# EAGLE board CAN_Base_V1 (EAGLE 9.7.0)
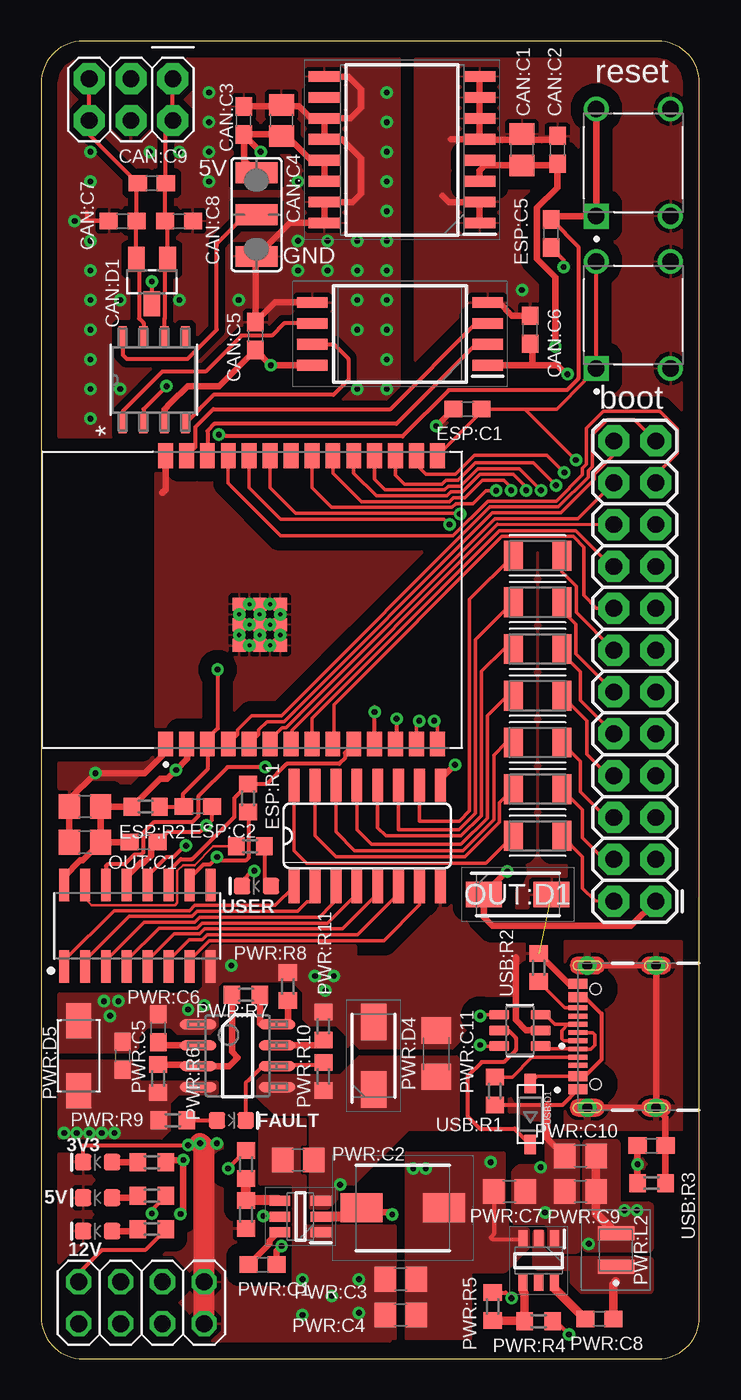
[diagram p0: board, top side]
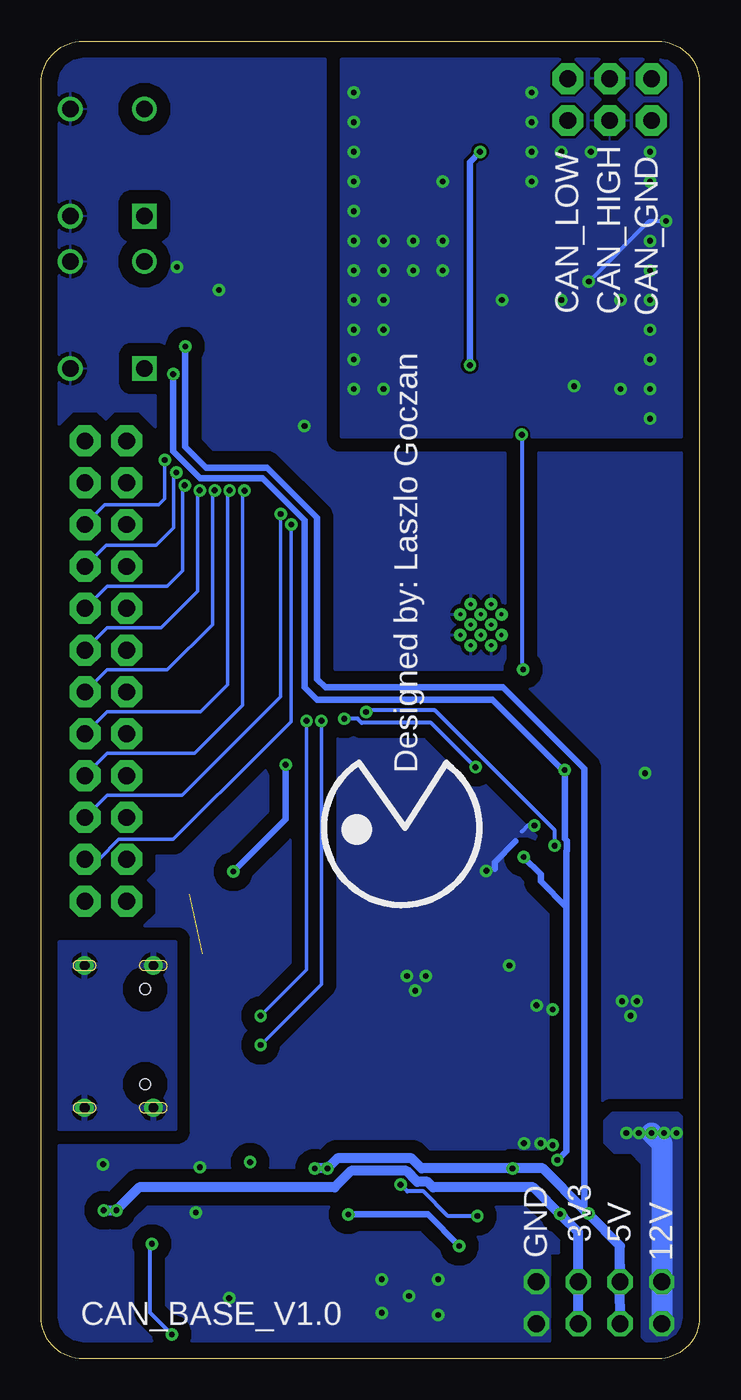
[diagram p1: board, bottom side, seen from below]

Size 40 x 80 mm. Coordinates in mm from the lower left corner, seen from the top.
Outline: 0,77.46 0,2.54 arc90 2.54,0 37.46,0 arc90 40,2.54 40,77.46 arc90 37.46,80 2.54,80 arc90 0,77.46
Copper layers (1*16): Top / Bottom
Stack-up Default Layer Stack: Top SilkScreen Epoxy Ink / Top SolderMask SR:Green 0.0254mm Dk 4.3 / Top Surface Finish Lead-Free 0.02mm / Top CuFoil:007 0.035mm / Dielectric-1 User Defined 1.5mm / Bottom CuFoil:007 0.035mm / Bottom Surface Finish Lead-Free 0.02mm / Bottom SolderMask SR:Green 0.0254mm Dk 4.3 / Bottom SilkScreen Epoxy Ink
Design rules: minimum copper width 6mil, minimum drill size 10mil, copper clearance wire_polygon to wire_polygon 6mil, copper clearance wire_polygon to pad_smd 6mil, copper clearance wire_polygon to via 6mil, copper clearance pad_smd to pad_smd 6mil, copper clearance pad_smd to via 6mil, copper clearance via to via 6mil, copper clearance smd to pad (same net) 6mil, copper clearance smd to via (same net) 6mil, copper clearance smd to smd (same net) 6mil, dimension clearance 40mil, via restrict clearance 0mil, restrict clearance 0mil, drill distance 6mil, keepout clearance 0mil

## Footprints (pad centres in the part's own frame; a part is rotated, then mirrored left to right if it is on the bottom)
C0805 = smd 1.3 x 1.5: 1 -0.95,0; 2 0.95,0
C0603 = smd 1.1 x 1: 1 -0.85,0; 2 0.85,0
SOT23 = smd 1.016 x 1.524: 1 -0.95,-1.354; 2 0.95,-1.354; 3 0,1.354
SOIC127P1030X265-16N = smd 1.925 x 0.65: 1 -4.712,4.445; 2 -4.712,3.175; 3 -4.712,1.905; 4 -4.712,0.635; 5 -4.712,-0.635; 6 -4.712,-1.905; 7 -4.712,-3.175; 8 -4.712,-4.445; 9 4.712,-4.445; 10 4.712,-3.175; 11 4.712,-1.905; 12 4.712,-0.635; 13 4.712,0.635; 14 4.712,1.905; 15 4.712,3.175; 16 4.712,4.445
SJ_2W = smd 1.27 x 2.54: 1 -2.54,0; 2 0,0; 3 2.54,0
SOIC127P1150X280-8N = smd 1.85 x 0.65: 1 -5.325,1.905; 2 -5.325,0.635; 3 -5.325,-0.635; 4 -5.325,-1.905; 5 5.325,-1.905; 6 5.325,-0.635; 7 5.325,0.635; 8 5.325,1.905
D8_TEX-L = smd 1.257 x 0.508: 1 -2.623,1.905; 2 -2.623,0.635; 3 -2.623,-0.635; 4 -2.623,-1.905; 5 2.623,-1.905; 6 2.623,-0.635; 7 2.623,0.635; 8 2.623,1.905
R0603 = smd 1 x 1.1: 1 -0.85,0; 2 0.85,0
SW_TS02-66-70-BK-260-SCR-D = drill 1 square: 1 -3.25,2.25 | drill 1: 2 3.25,2.25; 3 -3.25,-2.25; 4 3.25,-2.25
XCVR_ESP32-C6-WROOM-1-N8 = smd 1.5 x 0.9: 1 -8.75,5.26; 2 -8.75,3.99; 3 -8.75,2.72; 4 -8.75,1.45; 5 -8.75,0.18; 6 -8.75,-1.09; 7 -8.75,-2.36; 8 -8.75,-3.63; 9 -8.75,-4.9; 10 -8.75,-6.17; 11 -8.75,-7.44; 12 -8.75,-8.71; 13 -8.75,-9.98; 14 -8.75,-11.25; 15 8.75,-11.25; 16 8.75,-9.98; 17 8.75,-8.71; 18 8.75,-7.44; 19 8.75,-6.17; 20 8.75,-4.9; 21 8.75,-3.63; 22 8.75,-2.36; 23 8.75,-1.09; 24 8.75,0.18; 25 8.75,1.45; 26 8.75,2.72; 27 8.75,3.99; 28 8.75,5.26 | smd 0.8 x 0.8: 29_1 -2.755,0.79; 29_2 -1.505,0.79; 29_3 -0.255,0.79; 29_4 -2.755,-0.46; 29_5 -1.505,-0.46; 29_6 -0.255,-0.46; 29_7 -2.755,-1.71; 29_8 -1.505,-1.71; 29_9 -0.255,-1.71 | drill 0.25 pad 0.35: 30_1 -2.13,0.79; 30_2 -0.88,0.79; 30_3 -2.755,0.165; 30_4 -1.505,0.165; 30_5 -0.255,0.165; 30_6 -2.13,-0.46; 30_7 -0.88,-0.46; 30_8 -2.755,-1.085; 30_9 -1.505,-1.085; 30_10 -0.255,-1.085; 30_11 -2.13,-1.71; 30_12 -0.88,-1.71
2X03 = drill 1.016 pad 1.88 octagon: 1 -2.54,-1.27; 2 -2.54,1.27; 3 0,-1.27; 4 0,1.27; 5 2.54,-1.27; 6 2.54,1.27
2X04 = drill 1.016 octagon: 1 -3.81,-1.27; 2 -3.81,1.27; 3 -1.27,-1.27; 4 -1.27,1.27; 5 1.27,-1.27; 6 1.27,1.27; 7 3.81,-1.27; 8 3.81,1.27
DIOM5026X229N = smd 2.2 x 1.55: 1 -2.05,0; 2 2.05,0
LED-0603 = smd 1 x 1: A -0.877,0; C 0.877,0
FUSC3215X82N = smd 1.165 x 1.814: 1 -1.475,0; 2 1.475,0
SO16 = smd 0.66 x 2.032: 1 -4.445,-3.073; 2 -3.175,-3.073; 3 -1.905,-3.073; 4 -0.635,-3.073; 5 0.635,-3.073; 6 1.905,-3.073; 7 3.175,-3.073; 8 4.445,-3.073; 9 4.445,3.073; 10 3.175,3.073; 11 1.905,3.073; 12 0.635,3.073; 13 -0.635,3.073; 14 -1.905,3.073; 15 -3.175,3.073; 16 -4.445,3.073
SOIC127P600X175-16N = smd 1.969 x 0.602: 1 -2.474,4.445; 2 -2.474,3.175; 3 -2.474,1.905; 4 -2.474,0.635; 5 -2.474,-0.635; 6 -2.474,-1.905; 7 -2.474,-3.175; 8 -2.474,-4.445; 9 2.474,-4.445; 10 2.474,-3.175; 11 2.474,-1.905; 12 2.474,-0.635; 13 2.474,0.635; 14 2.474,1.905; 15 2.474,3.175; 16 2.474,4.445
C1206 = smd 1.6 x 1.8: 1 -1.4,0; 2 1.4,0
DIOM4325X250N = smd 2.12 x 1.5: 1 -2.115,0; 2 2.115,0
INDPM5752X300M = smd 2.55 x 1.75: 1 -2.5,0; 2 2.5,0
LCENA2520 = smd 0.85 x 2.2: 1 -1.025,0; 2 1.025,0
D0008A = smd 2.2 x 0.6: 1 -2.4,1.905; 2 -2.4,0.635; 3 -2.4,-0.635; 4 -2.4,-1.905; 5 2.4,-1.905; 6 2.4,-0.635; 7 2.4,0.635; 8 2.4,1.905
SOT95P280X110-6N = smd 1.25 x 0.6: 1 -1.25,0.95; 2 -1.25,0; 3 -1.25,-0.95; 4 1.25,-0.95; 5 1.25,0; 6 1.25,0.95
SOT95P280X100-6N = smd 1.05 x 0.55: 1 -1.3,0.95; 2 -1.3,0; 3 -1.3,-0.95; 4 1.3,-0.95; 5 1.3,0; 6 1.3,0.95
2X12 = drill 1.016 pad 1.88 octagon: 1 0,0; 2 0,2.54; 3 2.54,0; 4 2.54,2.54; 5 5.08,0; 6 5.08,2.54; 7 7.62,0; 8 7.62,2.54; 9 10.16,0; 10 10.16,2.54; 11 12.7,0; 12 12.7,2.54; 13 15.24,0; 14 15.24,2.54; 15 17.78,0; 16 17.78,2.54; 17 20.32,0; 18 20.32,2.54; 19 22.86,0; 20 22.86,2.54; 21 25.4,0; 22 25.4,2.54; 23 27.94,0; 24 27.94,2.54
SOD-123 = smd 1.2 x 0.7: A 1.85,0; C -1.85,0
GCT_USB4105-GF-A = smd 0.6 x 1.15: A1_B12 -3.2,4.755; A4_B9 -2.4,4.755; B1_A12 3.2,4.755; B4_A9 2.4,4.755 | smd 0.3 x 1.15: A5 -1.25,4.755; A6 -0.25,4.755; A7 0.25,4.755; A8 1.25,4.755; B5 1.75,4.755; B6 0.75,4.755; B7 -0.75,4.755; B8 -1.75,4.755 | drill 0.6 pad 1: SH1 -4.32,4.18; SH2 4.32,4.18; SH3 -4.32,0; SH4 4.32,0 | hole 0.65: 2.89,3.68; -2.89,3.68
SOT95P280X145-6N = smd 1.21 x 0.59: 1 -1.255,0.95; 2 -1.255,0; 3 -1.255,-0.95; 4 1.255,-0.95; 5 1.255,0; 6 1.255,0.95

## Placement (x,y rotation side)
CAN:C1  10u  [C0805]  29.21,73.41 90 top
CAN:C2  100n  [C0603]  31.37,73.41 90 top
CAN:C3  100n  [C0603]  12.32,75.18 90 top
CAN:C4  10u  [C0805]  14.61,75.18 90 top
CAN:C5  100n  [C0603]  13.02,62.1 90 top
CAN:C6  100n  [C0603]  29.71,62.48 90 top
CAN:C7  47p  [C0603]  4.95,69.09 180 top
CAN:C8  47p  [C0603]  8.38,69.09 180 top
CAN:C9  47p  [C0603]  6.73,71.37 0 top
CAN:D1  NUP2105L  [SOT23]  6.73,65.41 180 top
CAN:PS1  R05CTE05S-R  [SOIC127P1030X265-16N]  21.93,73.41 180 top
CAN:SJ1  [SJ_2W]  13.08,69.47 90 top
CAN:U1  ISO6721FQDWVRQ1  [SOIC127P1150X280-8N]  21.8,62.23 180 top
CAN:U2  TCAN1051HGDD8_TEX-L  [D8_TEX-L]  6.86,59.44 90 top
ESP:C1  0.1u  [C0603]  25.91,57.66 0 top
ESP:C2  1u  [C0603]  9.53,33.53 0 top
ESP:C3  10u  [C0805]  2.67,33.53 180 top
ESP:C4  10u  [C0805]  2.67,31.37 180 top
ESP:C5  0.1u  [C0603]  30.99,68.33 90 top
ESP:R1  3.3K  [R0603]  12.57,34.04 90 top
ESP:R2  10K  [R0603]  6.35,33.53 180 top
ESP:S1  TS02-66-70-BK-260-SCR-D  [SW_TS02-66-70-BK-260-SCR-D]  35.98,63.37 90 top
ESP:S2  TS02-66-70-BK-260-SCR-D  [SW_TS02-66-70-BK-260-SCR-D]  35.98,72.63 90 top
ESP:U1  ESP32-C6-WROOM-1-N8  [XCVR_ESP32-C6-WROOM-1-N8]  12.82,46.08 90 top
J2  [2X03]  5.46,76.45 180 top
JP1  PINHD-2X4  [2X04]  6.1,3.4 0 top
OUT:C1  100n  [C0603]  6.22,31.37 0 top
OUT:D1  SMAJ30A  [DIOM5026X229N]  28.96,28.19 0 top
OUT:D2  USER  [LED-0603]  13.08,28.7 180 top
OUT:F1  500mA  [FUSC3215X82N]  30.16,31.75 0 top
OUT:F2  500mA  [FUSC3215X82N]  30.16,34.59 0 top
OUT:F3  500mA  [FUSC3215X82N]  30.16,37.42 0 top
OUT:F4  500mA  [FUSC3215X82N]  30.16,40.26 0 top
OUT:F5  500mA  [FUSC3215X82N]  30.16,43.1 0 top
OUT:F6  500mA  [FUSC3215X82N]  30.16,45.93 0 top
OUT:F7  500mA  [FUSC3215X82N]  30.16,48.77 0 top
OUT:IC1  ULN2003AD  [SO16]  19.81,31.75 0 top
OUT:IC2  74HC595_SOIC  [SOIC127P600X175-16N]  5.84,26.29 90 top
OUT:R1  120R  [R0603]  12.7,31.11 0 top
PWR:C1  0.1u  [C0603]  13.46,5.71 0 top
PWR:C2  2.2u  [C0805]  15.62,12.06 180 top
PWR:C3  22u  [C0805]  21.84,4.83 180 top
PWR:C4  22u  [C0805]  21.84,2.67 180 top
PWR:C5  0.1u  [C0603]  4.95,18.4 90 top
PWR:C6  2n  [C0603]  7.11,20.07 90 top
PWR:C7  10u  [C0805]  28.45,10.16 0 top
PWR:C8  100n  [C0603]  33.91,2.41 0 top
PWR:C9  22u  [C0805]  32.77,10.16 180 top
PWR:C10  22u  [C0805]  32.77,12.32 180 top
PWR:C11  100u  [C1206]  24,18.53 90 top
PWR:D1  12V  [LED-0603]  3.43,7.75 180 top
PWR:D2  5V  [LED-0603]  3.43,9.78 180 top
PWR:D3  3V3  [LED-0603]  3.43,11.94 180 top
PWR:D4  SMAJ30A  [DIOM5026X229N]  20.19,18.4 90 top
PWR:D5  SMAJ58CA  [DIOM4325X250N]  2.29,18.4 270 top
PWR:D6  FAULT  [LED-0603]  11.56,14.48 0 top
PWR:L1  AMPLA5030S-6R8MT  [INDPM5752X300M]  21.97,9.17 0 top
PWR:L2  LCENA2520MKT2R2M0NK  [LCENA2520]  34.92,6.6 90 top
PWR:R1  1K  [R0603]  6.73,7.87 180 top
PWR:R2  320R  [R0603]  6.73,9.91 180 top
PWR:R3  120R  [R0603]  6.73,11.94 180 top
PWR:R4  31.6K  [R0603]  30.23,2.29 0 top
PWR:R5  10K  [R0603]  27.43,3.17 270 top
PWR:R6  470R  [R0603]  7.11,17.02 90 top
PWR:R7  64.9K  [R0603]  12.45,22.1 0 top
PWR:R8  30.9k  [R0603]  14.99,22.61 90 top
PWR:R9  1K  [R0603]  8,14.48 0 top
PWR:R10  100K  [R0603]  17.14,17.14 90 top
PWR:R11  154K  [R0603]  17.14,20.19 90 top
PWR:R12  100K  [R0603]  12.45,11.81 90 top
PWR:R13  13.7K  [R0603]  12.45,8.76 90 top
PWR:U1  TPS25921ADD0008A  [D0008A]  11.94,18.4 0 top
PWR:U2  LMR51430YDDCR  [SOT95P280X110-6N]  15.75,8.64 180 top
PWR:U3  AP62250WU-7  [SOT95P280X100-6N]  30.23,5.97 270 top
U$1  PINH2X12  [2X12]  37.34,27.79 90 top
USB:C1  1n  [C0603]  37.08,12.95 180 top
USB:D1  40V  [SOD-123]  29.72,14.86 90 top
USB:J1  USB4105-GF-A  [GCT_USB4105-GF-A]  37.36,19.56 90 top
USB:R1  5.1K  [R0603]  27.56,16.26 90 top
USB:R2  5.1K  [R0603]  30.23,23.75 90 top
USB:R3  100k  [R0603]  37.08,10.67 0 top
USB:U1  USBLC6-2SC6  [SOT95P280X145-6N]  29.08,19.94 180 top

## Library data of the parts
CAN:C1-CAN:C9 ESP:C1-ESP:C5 ESP:R1 ESP:R2 OUT:C1 OUT:R1 PWR:C1-PWR:C11 PWR:R1-PWR:R13 USB:C1 USB:R1-USB:R3 = resistor
CAN:D1 = NUP2105L; AVAILABILITY: In Stock; CHECK_PRICES: https://www.snapeda.com/parts/NUP2105L/Diotec/view-part/?ref=eda; DESCRIPTION: ESD, SOT-23, 0.1A, 24V, Unidir; MF: Diotec Semiconductor; MP: NUP2105L; PACKAGE: SOT-23-3 Diotec; PRICE: None; PURCHASE-URL: https://www.snapeda.com/api/url_track_click_mouser/?unipart_id=5164164&manufacturer=Diotec Semiconductor&part_name=NUP2105L&search_term=nup2105l; SNAPEDA_LINK: https://www.snapeda.com/parts/NUP2105L/Diotec/view-part/?ref=snap
CAN:PS1 = R05CTE05S-R; DESCRIPTION: 1 Watt 16-Pin SOIC Single Output, 5VDC, Tape & Reel; HEIGHT: 2.65mm; MANUFACTURER_NAME: RECOM Power; MANUFACTURER_PART_NUMBER: R05CTE05S-R; MOUSER_PART_NUMBER: 919-R05CTE05S-R; MOUSER_PRICE-STOCK: https://www.mouser.co.uk/ProductDetail/RECOM-Power/R05CTE05S-R?qs=7D1LtPJG0i0SUCKLd%252BnSSQ%3D%3D
CAN:SJ1 J2 U$1 = SparkFun-Retired
CAN:U1 = ISO6721FQDWVRQ1; DESCRIPTION: Digital Isolators Automotive, general-purpose, dual-channel, 1/1 digital isolator; HEIGHT: 2.8mm; MANUFACTURER_NAME: Texas Instruments; MANUFACTURER_PART_NUMBER: ISO6721FQDWVRQ1; MOUSER_PART_NUMBER: 595-ISO6721FQDWVRQ1; MOUSER_PRICE-STOCK: https://www.mouser.co.uk/ProductDetail/Texas-Instruments/ISO6721FQDWVRQ1?qs=TuK3vfAjtkVdnWQ4lceCiA%3D%3D
CAN:U2 = 2024-02-16_18-01-42_Library; COPYRIGHT: Copyright (C) 2024 Ultra Librarian. All rights reserved.; MANUFACTURER_PART_NUMBER: TCAN1051HGD; MFR_NAME: Texas Instruments
ESP:S1 ESP:S2 = TS02-66-70-BK-260-SCR-D; AVAILABILITY: In Stock; CHECK_PRICES: https://www.snapeda.com/parts/TS02-66-70-BK-260-SCR-D/CUI+Devices/view-part/?ref=eda; CUI_PURCHASE_URL: https://www.cuidevices.com/product/switches/tactile-switches/ts02-66-70-bk-260-scr-d?utm_source=snapeda.com&utm_medium=referral&utm_campaign=snapedaBOM; DESCRIPTION: 6 x 6 mm, 7 mm Actuator Height, 260 gf, Black, Short Crimped, Through Hole, SPST, Tactile Switch; MF: CUI Devices; MP: TS02-66-70-BK-260-SCR-D; PACKAGE: None; PRICE: None; PURCHASE-URL: https://www.snapeda.com/api/url_track_click_mouser/?unipart_id=8666189&manufacturer=CUI Devices&part_name=TS02-66-70-BK-260-SCR-D&search_term=ts02-66; SNAPEDA_LINK: https://www.snapeda.com/parts/TS02-66-70-BK-260-SCR-D/CUI+Devices/view-part/?ref=snap
ESP:U1 = ESP32-FIXED; AVAILABILITY: In Stock; CHECK_PRICES: https://www.snapeda.com/parts/ESP32-C6-WROOM-1-N8/Espressif+Systems/view-part/?ref=eda; DESCRIPTION: Multiprotocol Modules ESP32-C6 module, Wi-Fi 6 in 2.4 GHz band, Bluetooth 5, Zigbee 3.0 and Thread. ESP34-WROOM Compatible - ENGINEERING SAMPLE; MF: Espressif Systems; MP: ESP32-C6-WROOM-1-N8; PACKAGE: None; PRICE: None; PURCHASE-URL: https://www.snapeda.com/api/url_track_click_mouser/?unipart_id=12616380&manufacturer=Espressif Systems&part_name=ESP32-C6-WROOM-1-N8&search_term=esp32 c6 wroom; SNAPEDA_LINK: https://www.snapeda.com/parts/ESP32-C6-WROOM-1-N8/Espressif+Systems/view-part/?ref=snap
JP1 = Connector; CATEGORY: Headers; DESCRIPTION: Header, Straight, 2x4 Position; MANUFACTURER: Generic; MPN: Generic; OPERATING_TEMPERATURE: Generic; PART_STATUS: Active; PITCH: 0.100" (2.54mm); ROHS_COMPLIANCE: Generic; SERIES: Generic; SUB-CATEGORY: Headers, Male Pins; TYPE: Board to Board or Cable, Unshrouded, Through Hole, Straight
OUT:D1 PWR:D4 = SMAJ30A; DESCRIPTION: ESD Suppressors / TVS Diodes 400W 30V 5% Uni-Directional; HEIGHT: 2.29mm; MANUFACTURER_NAME: LITTELFUSE; MANUFACTURER_PART_NUMBER: SMAJ30A; MOUSER_PART_NUMBER: 576-SMAJ30A; MOUSER_PRICE-STOCK: https://www.mouser.co.uk/ProductDetail/Littelfuse/SMAJ30A?qs=JJML70Qc14tOmIOtllb78g%3D%3D
OUT:D2 PWR:D1-PWR:D3 PWR:D6 = SparkFun-LED; PROD_ID: DIO-08575
OUT:F1-OUT:F7 = Circuit-Protection; CATEGORY: Circuit-Protection; SUB-CATEGORY: Fuse
OUT:IC1 = uln-udn
OUT:IC2 = IC_Logic; CATEGORY: IC_Logic; DESCRIPTION: 8-Bit Shift Registers; MANUFACTURER: Generic; MPN: Generic; SUB-CATEGORY: Shift Register; TYPE: 8-Bit
PWR:D5 = SMAJ58CA; AVAILABILITY: In Stock; CHECK_PRICES: https://www.snapeda.com/parts/SMAJ58CA/Taiwan+Semiconductor/view-part/?ref=eda; DESCRIPTION: 400W, 67.8V, 5%, Bidirectional, TVS; MF: Taiwan Semiconductor; MP: SMAJ58CA; PACKAGE: SMA Taiwan Semiconductor; PRICE: None; SNAPEDA_LINK: https://www.snapeda.com/parts/SMAJ58CA/Taiwan+Semiconductor/view-part/?ref=snap
PWR:L1 = AMPLA5030S-6R8MT; DESCRIPTION: Inductor Power Shielded/Molded Wirewound 6.8uH 20% 100KHz Carbonyl Powder 4A 0.0762Ohm DCR 2220 T/R; HEIGHT: 3mm; MANUFACTURER_NAME: ABRACON; MANUFACTURER_PART_NUMBER: AMPLA5030S-6R8MT; MOUSER_PART_NUMBER: 815-AMPLA5030S-6R8MT; MOUSER_PRICE-STOCK: https://www.mouser.co.uk/ProductDetail/ABRACON/AMPLA5030S-6R8MT?qs=vmHwEFxEFR8Kq8c8UlgcTw%3D%3D
PWR:L2 = LCENA2520MKT2R2M0NK; DESCRIPTION: INDUCTORS[Wire-wound Metal Power Inductors MCOIL LCEN series for Automotive Body & Chassis and Infotainment]; HEIGHT: mm; MANUFACTURER_NAME: TAIYO YUDEN; MANUFACTURER_PART_NUMBER: LCENA2520MKT2R2M0NK
PWR:U1 = 2025-09-25_09-55-04_Library; COPYRIGHT: Copyright (C) 2025 Ultra Librarian. All rights reserved.; DATASHEET: https://www.ti.com/lit/gpn/tps25921a; DESCRIPTION: 4.5-V to 18-V, 90mΩ, 0.4-1.6A eFuse with auto retry fault response 8-SOIC -40 to 85; MANUFACTURER_NAME: Texas Instruments; MANUFACTURER_PART_NUMBER: TPS25921AD; REFDES: RefDes; TYPE: TYPE
PWR:U2 = LMR51430YDDCR; DESCRIPTION: Switching Voltage Regulators SIMPLE SWITCHER&reg; 4.5-V to 36-V, 3-A synchronous buck converter with 40-&micro;A IQ; HEIGHT: 1.1mm; MANUFACTURER_NAME: Texas Instruments; MANUFACTURER_PART_NUMBER: LMR51430YDDCR; MOUSER_PART_NUMBER: 595-LMR51430YDDCR; MOUSER_PRICE-STOCK: https://www.mouser.co.uk/ProductDetail/Texas-Instruments/LMR51430YDDCR?qs=vvQtp7zwQdMdLcsY5sFiMg%3D%3D
PWR:U3 = AP62250WU-7; DESCRIPTION: DCDC CONV HV BUCK TSOT26 T&R 3K; HEIGHT: 1mm; MANUFACTURER_NAME: Diodes Incorporated; MANUFACTURER_PART_NUMBER: AP62250WU-7; MOUSER_PART_NUMBER: 621-AP62250WU-7; MOUSER_PRICE-STOCK: https://www.mouser.co.uk/ProductDetail/Diodes-Incorporated/AP62250WU-7?qs=7MVldsJ5Uax1PUc8sdeimQ%3D%3D
USB:D1 = Tubescreamer
USB:J1 = USB4105-GF-A; AVAILABILITY: In Stock; CHECK_PRICES: https://www.snapeda.com/parts/USB4105-GF-A/Global+Connector+Technology/view-part/?ref=eda; DESCRIPTION: USB-C (USB TYPE-C) USB 2.0 Receptacle Connector 24 (16+8 Dummy) Position Surface Mount, Right Angle; Through Hole; MF: GCT; MP: USB4105-GF-A; PACKAGE: None; PRICE: None; PURCHASE-URL: https://www.snapeda.com/api/url_track_click_mouser/?unipart_id=4423780&manufacturer=GCT&part_name=USB4105-GF-A&search_term=usb4105-gf-a; SNAPEDA_LINK: https://www.snapeda.com/parts/USB4105-GF-A/Global+Connector+Technology/view-part/?ref=snap
USB:U1 = USBLC6-2SC6; AVAILABILITY: In Stock; CHECK_PRICES: https://www.snapeda.com/parts/USBLC6-2SC6/STMicroelectronics/view-part/?ref=eda; DESCRIPTION: 17V Clamp 5A (8/20µs) Ipp Tvs Diode Surface Mount SOT-23-6; MF: STMicroelectronics; MP: USBLC6-2SC6; PACKAGE: SOT-23-6 STMicroelectronics; PRICE: None; PURCHASE-URL: https://www.snapeda.com/api/url_track_click_mouser/?unipart_id=231887&manufacturer=STMicroelectronics&part_name=USBLC6-2SC6&search_term=usblc6-2sc6; SNAPEDA_LINK: https://www.snapeda.com/parts/USBLC6-2SC6/STMicroelectronics/view-part/?ref=snap

## Nets
3V3: CAN:C6.1 CAN:U1.1 ESP:C3.1 ESP:C4.1 ESP:R1.1 ESP:R2.2 ESP:U1.2 JP1.5 JP1.6 OUT:C1.1 OUT:IC2.10 OUT:IC2.16 PWR:C9.1 PWR:C10.1 PWR:L2.2 PWR:R3.1 PWR:R4.2
5V: CAN:C1.1 CAN:C2.1 CAN:PS1.3 CAN:PS1.4 JP1.3 JP1.4 PWR:C3.1 PWR:C4.1 PWR:C7.1 PWR:L1.2 PWR:R2.1 PWR:R12.2 PWR:U3.3
12V: JP1.1 JP1.2 PWR:C5.1 PWR:D5.2 PWR:R1.1 PWR:R6.1 PWR:R9.1 PWR:U1.4
CAN:5V0_CAN: CAN:C3.1 CAN:C4.1 CAN:C5.1 CAN:PS1.13 CAN:PS1.14 CAN:SJ1.3 CAN:U1.8 CAN:U2.3
CAN:N$1: CAN:SJ1.2 CAN:U2.8
CAN:RX_CAN: CAN:U1.7 CAN:U2.4
CAN:TX_CAN: CAN:U1.6 CAN:U2.1
CAN_GND: CAN:C3.2 CAN:C4.2 CAN:C5.2 CAN:C7.2 CAN:C8.1 CAN:D1.3 CAN:PS1.9 CAN:PS1.11 CAN:PS1.12 CAN:PS1.15 CAN:PS1.16 CAN:SJ1.1 CAN:U1.5 CAN:U2.2 J2.3 J2.4
CAN_HIGH: CAN:C7.1 CAN:C9.1 CAN:D1.2 CAN:U2.7 J2.5 J2.6
CAN_LOW: CAN:C8.2 CAN:C9.2 CAN:D1.1 CAN:U2.6 J2.1 J2.2
ESP:EN: ESP:C2.1 ESP:C5.2 ESP:R2.1 ESP:S2.1 ESP:S2.2 ESP:U1.3
GND: CAN:C1.2 CAN:C2.2 CAN:C6.2 CAN:PS1.1 CAN:PS1.2 CAN:PS1.5 CAN:PS1.6 CAN:PS1.7 CAN:PS1.8 CAN:U1.4 ESP:C1.1 ESP:C2.2 ESP:C3.2 ESP:C4.2 ESP:C5.1 ESP:S1.3 ESP:S1.4 ESP:S2.3 ESP:S2.4 ESP:U1.1 ESP:U1.28 ESP:U1.29_1 ESP:U1.29_2 ESP:U1.29_3 ESP:U1.29_4 ESP:U1.29_5 ESP:U1.29_6 ESP:U1.29_7 ESP:U1.29_8 ESP:U1.29_9 ESP:U1.30_1 ESP:U1.30_2 ESP:U1.30_3 ESP:U1.30_4 ESP:U1.30_5 ESP:U1.30_6 ESP:U1.30_7 ESP:U1.30_8 ESP:U1.30_9 ESP:U1.30_10 ESP:U1.30_11 ESP:U1.30_12 JP1.7 JP1.8 OUT:C1.2 OUT:D1.2 OUT:D2.C OUT:IC1.8 OUT:IC2.8 OUT:IC2.13 PWR:C2.2 PWR:C3.2 PWR:C4.2 PWR:C5.2 PWR:C6.2 PWR:C7.2 PWR:C9.2 PWR:C10.2 PWR:C11.2 PWR:D1.C PWR:D2.C PWR:D3.C PWR:D4.2 PWR:D5.1 PWR:R5.1 PWR:R8.2 PWR:R11.2 PWR:R13.1 PWR:U1.1 PWR:U2.1 PWR:U3.1 USB:C1.2 USB:J1.A1_B12 USB:J1.B1_A12 USB:R1.1 USB:R2.2 USB:R3.1 USB:U1.2
GPIO0: ESP:U1.9 U$1.16
GPIO1: ESP:U1.8 U$1.18
GPIO2: ESP:U1.7 U$1.20
GPIO3: ESP:U1.6 U$1.22
GPIO4: ESP:U1.5 U$1.24
GPIO5: ESP:U1.4 U$1.23
GPIO6: ESP:U1.25 U$1.21
GPIO7: ESP:C1.2 ESP:S1.1 ESP:S1.2 ESP:U1.15 U$1.19
GPIO8: ESP:U1.16 U$1.17
GPIO9: ESP:U1.17 U$1.15
GPIO10: ESP:U1.18 U$1.13
GPIO11: ESP:U1.19 U$1.11
GPIO12: ESP:U1.20 U$1.9
GPIO13: ESP:U1.21 U$1.7
GPIO14: ESP:U1.23 U$1.5
GPIO15: ESP:U1.24 U$1.3
N$1: OUT:D1.1 OUT:IC1.9 U$1.1
N$3: CAN:U1.2
N$4: CAN:U1.3
N$5: ESP:R1.2 ESP:U1.10 OUT:IC2.11
N$6: ESP:U1.12 OUT:IC2.14
N$7: ESP:U1.11 OUT:IC2.12
OUT0: OUT:F1.2 U$1.2
OUT1: OUT:F2.2 U$1.4
OUT2: OUT:F3.2 U$1.6
OUT3: OUT:F4.2 U$1.8
OUT4: OUT:F5.2 U$1.10
OUT5: OUT:F6.2 U$1.12
OUT6: OUT:F7.2 U$1.14
OUT:N$1: OUT:F1.1 OUT:IC1.16
OUT:N$2: OUT:F2.1 OUT:IC1.15
OUT:N$3: OUT:F3.1 OUT:IC1.14
OUT:N$4: OUT:F4.1 OUT:IC1.13
OUT:N$5: OUT:F5.1 OUT:IC1.12
OUT:N$6: OUT:F6.1 OUT:IC1.11
OUT:N$7: OUT:F7.1 OUT:IC1.10
OUT:N$8: OUT:IC1.1 OUT:IC2.1
OUT:N$9: OUT:IC1.2 OUT:IC2.2
OUT:N$10: OUT:IC1.3 OUT:IC2.3
OUT:N$11: OUT:IC1.4 OUT:IC2.4
OUT:N$12: OUT:IC1.5 OUT:IC2.5
OUT:N$13: OUT:IC1.6 OUT:IC2.6
OUT:N$14: OUT:IC1.7 OUT:IC2.7
OUT:N$31: OUT:IC2.15 OUT:R1.1
OUT:N$35: OUT:D2.A OUT:R1.2
PWR:12V_FUSED: PWR:C2.1 PWR:C11.1 PWR:D4.1 PWR:R10.1 PWR:U1.5 PWR:U2.3 PWR:U2.5
PWR:N$1: PWR:C1.2 PWR:L1.1 PWR:U2.2
PWR:N$2: PWR:C1.1 PWR:U2.6
PWR:N$3: PWR:R12.1 PWR:R13.2 PWR:U2.4
PWR:N$4: PWR:C8.1 PWR:U3.6
PWR:N$5: PWR:D6.A PWR:R9.2
PWR:N$6: PWR:D1.A PWR:R1.2
PWR:N$7: PWR:D2.A PWR:R2.2
PWR:N$11: PWR:R4.1 PWR:R5.2 PWR:U3.4
PWR:N$12: PWR:R6.2 PWR:R7.1 PWR:U1.3
PWR:N$13: PWR:R7.2 PWR:R8.1 PWR:U1.8
PWR:N$14: PWR:R11.1 PWR:U1.7
PWR:N$15: PWR:C6.1 PWR:U1.2
PWR:N$17: PWR:D6.C PWR:R10.2 PWR:U1.6
PWR:N$35: PWR:D3.A PWR:R3.2
PWR:SW: PWR:C8.2 PWR:L2.1 PWR:U3.2
RX: CAN:U1.2 ESP:U1.26
TX: CAN:U1.3 ESP:U1.27
USB:5V: USB:D1.C USB:U1.5
USB:N$1: USB:J1.A5 USB:R1.2
USB:N$2: USB:J1.B5 USB:R2.1
USB:N$5: USB:D1.A USB:J1.A4_B9 USB:J1.B4_A9
USB:N$6: USB:C1.1 USB:J1.SH1 USB:J1.SH2 USB:J1.SH3 USB:J1.SH4 USB:R3.2
USB:U_N: USB:J1.A7 USB:J1.B7 USB:U1.1
USB:U_P: USB:J1.A6 USB:J1.B6 USB:U1.3
USB_N: ESP:U1.13 USB:U1.6
USB_P: ESP:U1.14 USB:U1.4

## Tracks (layer width: path | path; a pad name or v marks a point on that pad's centre or on a via)
3V3  (via drill 0.35)
  Top 0.254: ESP:R1.1 12.63,33.13 12.63,30.45 12.47,30.29 10.67,30.29 10.67,30.44 v10.69,30.46 10.25,30.03 9.87,30.03 9.02,29.17 OUT:IC2.10 | v32.06,1.48 31.26,2.29 PWR:R4.2
  Top 0.406: CAN:U1.1 29.84,60.33 | 29.84,60.33 31.37,60.33 31.91,59.78 | ESP:U1.2 8.88,37.28 8.88,36.43 v8.19,35.75 7.65,35.2 7.22,35.2 5.54,33.53 ESP:R2.2 ESP:C3.1 ESP:C4.1 | ESP:C4.1 OUT:C1.1 | ESP:C4.1 2.72,30.48 2.72,30.47 2.51,30.26 2.38,30.26 1.4,29.28 OUT:IC2.16 | 31.91,59.78 31.34,60.35 | CAN:C6.1 29.84,61.49 29.84,60.33 | v31.98,59.78 31.91,59.78 | PWR:R3.1 7.71,12.06 v8.64,12.06 8.64,8.96 v8.47,8.79
  Top 0.508: PWR:L2.2 33.72,8.84 PWR:C10.1
  Bottom 0.254: v33.27,6.99 33.4,6.99 33.4,2.82 v32.06,1.48
  Bottom 0.406: v31.98,59.78 31.98,55.09 30.35,53.47 26.54,53.47 24,50.93 24,40.77 23.24,40.01 14.61,40.01 12.57,40.01 8.26,35.69 v8.19,35.75 8.19,31.58 8.07,31.46 8.07,30.85 8.1,30.83 8.1,27.43 | 8.1,27.43 8.1,12.61 v8.64,12.06 | 8.1,27.43 9.65,28.99 9.65,29.43 v10.69,30.46
  Bottom 0.61: 7.37,7.69 7.37,4.7 JP1.5 | 7.37,7.69 8.35,8.67 | 8.35,8.67 10.1,10.41 16.19,10.41 16.52,10.74 17.15,10.74 17.82,11.41 21.17,11.41 22.17,10.41 34.04,10.41 v35.43,9.02 v36.2,9.02 | 8.21,8.53 8.35,8.67 | 8.21,8.53 8.35,8.67 | 8.21,8.53 v8.47,8.79 8.21,8.53 | JP1.6 7.37,7.69
  pour Top (no thermals): 32.89,13.34 32.89,6.48 37.21,6.48 37.21,9.53 35.18,9.53 35.18,13.34
5V  (via drill 0.35)
  Top 0.254: PWR:R2.1 6.73,9.06 v6.73,8.82 | PWR:R12.2 11.56,11.77 11.56,11.75 v11.37,11.56 | PWR:C7.1 27.5,7.56 27.3,7.37 27.4,7.27 PWR:U3.3
  Top 0.406: 26.95,72.46 CAN:C1.1 31.27,72.46 CAN:C2.1 31.37,71.11 30.13,69.87 30.13,66.78 31.24,65.67 v31.24,61.47 | 26.95,72.46 CAN:PS1.4 | CAN:PS1.3 26.64,72.14 26.95,72.46
  Bottom 0.406: v31.24,61.47 31.24,55.37 30.48,54.61 29.97,54.1 26.29,54.1 23.24,51.05 23.24,41.27 22.73,40.77 11.94,40.77 6.99,35.81 6.99,9.02
  Bottom 0.61: 4.83,6.86 4.83,4.57 JP1.3 | 4.83,6.86 6.73,8.76 | 6.73,8.76 6.99,9.02 9.53,11.56 11.56,11.56 | v23.37,11.56 v22.61,11.56 21.99,12.17 17.5,12.17 16.89,11.56 11.56,11.56 | 6.73,8.76 v6.73,8.82 6.73,8.76 | 11.56,11.56 v11.37,11.56 11.56,11.56 | JP1.4 4.83,6.86
  other vias: 27.3,11.94
  pour Top (no thermals): 22.1,12.57 22.1,1.14 26.16,1.14 26.16,5.21 28.19,5.21 28.19,12.57
  pour Top (rank 4, no thermals): 29.72,8.38 29.72,6.73 28.19,5.21 27.56,5.21 27.05,5.71 27.05,9.02 29.46,9.02 29.59,8.89
12V  (via drill 0.35)
  Top 0.254: PWR:R1.1 6.31,6.6 3.68,6.6 2.29,5.21 JP1.2
  Bottom 1.27: v2.92,13.72 2.29,13.08 JP1.2 JP1.1
  other vias: 2.16,13.72 3.68,13.72 4.45,13.72 1.4,13.72
  pour Top (no thermals): 7.37,13.34 -0.13,13.34 -0.25,13.46 -0.25,18.03 -0.13,18.16 5.46,18.16 5.97,17.65 5.97,17.02 6.1,16.89 10.67,16.89 10.79,16.76 10.79,16.13 10.67,16 8.38,16 7.87,15.49 7.87,13.84
  pour Bottom (no thermals): 5.33,14.99 1.27,14.99 0.51,14.22 0.51,1.78 1.65,0.64 2.92,0.64 3.56,1.27 3.56,11.81 4.19,12.45 5.21,12.45 5.84,13.08 5.84,14.48
CAN:5V0_CAN  (via drill 0.35)
  Top 0.254: CAN:C4.1 14.51,74.33 CAN:C3.1
  Top 0.406: CAN:PS1.14 CAN:PS1.13 16.38,72.77 14.82,74.33 CAN:C3.1 12.32,74.04 | CAN:SJ1.3 12.32,72.77 12.32,74.04 | CAN:U1.8 v13.95,60.33 CAN:C5.1 10.82,59.05 9.91,59.05 8.89,59.05 7.87,58.04 7.49,57.66 CAN:U2.3 | v13.34,73.28 12.57,74.04 12.32,74.04
  Bottom 0.406: v13.95,60.33 13.95,72.66 v13.34,73.28
CAN:N$1
  Top 0.254: CAN:U2.8 4.95,60.96 5.21,60.71 8.89,60.71 9.4,61.21 10.67,62.48 10.67,67.56 10.67,67.69 12.19,69.22 | 12.19,69.22 12.45,69.47 | CAN:SJ1.2 12.83,69.22 12.19,69.22
CAN:RX_CAN
  Top 0.254: CAN:U2.4 10.47,58.52 17.75,58.52 18.67,59.44 18.67,60.71 17.78,61.59 CAN:U1.7
CAN:TX_CAN
  Top 0.254: CAN:U2.1 4.95,57.53 7.37,59.94 9.98,59.94 12.16,62.12 14.02,62.12 14.76,62.87 CAN:U1.6
CAN_GND  (via drill 0.35)
  Top 0.254: CAN:U2.2 6.22,57.07 6.22,57.66 v7.62,59.05 | 2.79,69.6 2.79,69.09 CAN:C7.2 v2.03,69.09 | CAN:D1.3 v6.73,65.41
  Top 0.406: CAN:PS1.11 CAN:PS1.12 | CAN:PS1.9 18.67,77.85 19.43,77.09 19.43,75.95 18.8,75.31 17.91,75.31 | CAN:C3.2 15.66,76.03 16.38,75.31 | 17.91,74.04 18.29,74.04 19.43,72.9 19.43,72.39 19.43,70.74 18.92,70.23 CAN:PS1.15 CAN:PS1.16 15.11,68.96 CAN:SJ1.1 13.02,66.87 CAN:C5.2 14.2,64.14 CAN:U1.5
  Bottom 0.254: v6.73,65.41 3.05,69.09 v2.03,69.09
  other vias: 21,76.88 10.2,76.88 21,75.08 10.2,75.08 21,73.28 10.2,73.28 8.4,73.28 6.6,73.28 3,73.28 21,71.48 15.6,71.48 10.2,71.48 3,71.48 21,69.68 21,67.88 19.2,67.88 17.4,67.88 15.6,67.88 3,67.88 21,66.08 19.2,66.08 17.4,66.08 3,57.08 3,58.88 4.8,58.88 19.2,58.88 21,58.88 3,60.68 21,60.68 3,62.48 19.2,62.48 21,62.48 3,64.28 4.8,64.28 8.4,64.28 12,64.28 19.2,64.28 21,64.28 3,66.08 15.6,66.08
  pour Bottom: 21.84,83.31 21.84,55.88 -3.68,55.88 -3.68,83.19 -2.29,83.19
  pour Top (isolate 0.406, rank 4): -3.81,83.19 21.84,83.19 21.84,55.88 -3.68,55.88
CAN_HIGH
  Top 0.254: CAN:U2.7 6.22,62.89 5.94,63.17 5.94,66.6 CAN:D1.2 5.78,69.07 CAN:C7.1 5.8,71.3 CAN:C9.1 2.92,74.33 J2.6 J2.5
CAN_LOW
  Top 0.254: CAN:U2.6 7.49,63.15 7.52,63.17 7.52,66.6 CAN:D1.1 7.68,68.94 CAN:C8.2 7.53,71.33 CAN:C9.2 7.58,74.76 J2.2 J2.1
ESP:EN  (via drill 0.35)
  Top 0.254: ESP:R2.1 ESP:C2.1 8.63,33.57 8.63,34.31 10.1,35.78 ESP:U1.3 10.39,37.61 10.39,37.94 10.72,38.27 v10.72,41.86 | v10.79,56.11 10.79,56.01 21.96,56.01 24.77,58.82 31.95,58.82 32.63,59.51 32.63,67.53 ESP:C5.2
  Top 0.406: ESP:S2.2 ESP:S2.1 31.19,69.38 ESP:C5.2
  Bottom 0.254: v10.79,56.11 10.79,41.93 v10.72,41.86
GND  (via drill 0.35)  (1 unrouted)
  Top 0.203: v12.95,29.63 12.83,29.63
  Top 0.254: PWR:R5.1 28.23,4.03 v28.57,3.68 | USB:J1.A1_B12 31.65,15.41 30.73,15.41 USB:R1.1 | PWR:D3.C 2.55,12.95 8.64,12.95 | 8.64,12.95 9.53,12.95 | OUT:D2.C 12.2,29 12.83,29.63 | v8.93,12.97 8.91,12.95 8.64,12.95 | v31.75,66.29 31.75,66.71 ESP:C5.1 | OUT:C1.2 7.71,32 9.65,32 v10.03,32.38 10.38,32.73 ESP:C2.2
  Top 0.406: CAN:C6.2 28.61,63.33 27.81,64.14 | CAN:C2.2 31.11,74 26.68,74 CAN:PS1.5 CAN:PS1.8 | CAN:PS1.1 CAN:PS1.2 25.4,70.23 24.77,70.23 24.38,70.61 | 24.89,74.04 26.04,74.04 | ESP:C4.2 ESP:C3.2 1.72,33.98 v3.3,35.56 6.3,35.56 7.32,36.58 7.32,37.08 ESP:U1.1 | USB:C1.2 v36.23,11.81 USB:R3.1 | 2.55,10.03 PWR:D2.C 2.55,9.53 | 2.55,8 PWR:D1.C | ESP:U1.28 7.56,52.77 7.37,52.58 | ESP:C1.1 24.04,56.64 v24,56.64 | OUT:C1.2 7.11,31.37 6.68,30.94 6.68,30.55 6.24,30.11 6.03,30.11 5.21,29.28 OUT:IC2.13 | USB:J1.B1_A12 32.06,22.76 USB:R2.2 | USB:U1.2 29.46,19.94 28.83,20.57 28.83,24.38 | PWR:C10.2 30.73,13.4 30.73,15.41
  Top 1.27: JP1.7 9.91,12.83 v9.65,13.08
  Bottom 0.254: v10.03,32.38 10.41,32.38 10.79,32
  Bottom 0.406: 12.45,29.75 12.45,30.16 11.17,31.44
  other vias: 30.61,8.89 19.3,4.83 19.3,2.79 15.88,2.67 15.88,4.83 17.65,3.81 3.81,21.72 4.7,21.72 4.19,20.83 9.91,21.46 11.56,23.88 17.27,22.35 16.64,23.24 17.78,23.24 30.35,11.63 10.67,13.08 8.93,21.21 29.21,64.9
  pour Bottom (isolate 0.813, rank 5): 57.91,86.23 57.91,6.35 -9.53,6.35 -9.53,85.72 -12.19,85.72
  pour Top (rank 2, no thermals): 33.53,13.34 33.53,6.1 33.27,5.84 30.86,5.84 30.61,6.1 30.61,8.13 28.57,8.13 28.57,11.43 28.96,11.81 30.48,11.81 30.61,11.94 30.61,13.21 30.73,13.34
  pour Top (no thermals): 13.21,14.61 13.21,10.54 15.24,10.54 15.24,1.14 21.59,1.14 21.59,8.13 16.13,8.13 16.13,14.61
  pour Top (no thermals): 25.4,21.46 25.4,19.18 25.02,18.8 19.3,18.8 17.91,20.19 16.26,20.19 15.88,20.57 15.88,22.23 15.24,22.86 11.05,22.86 10.79,22.61 10.79,20.19 10.29,19.68 8.26,19.68 7.87,20.07 6.48,20.07 5.97,19.56 5.97,18.92 5.59,18.54 -0.64,18.54 -0.64,21.84 -0.25,22.23 9.4,22.23 9.78,22.61 9.78,24.64 10.29,25.15 19.18,25.15 19.18,22.48 19.68,21.97 24.89,21.97
  pour Bottom (isolate 0.813, no thermals): 9.02,-1.02 9.02,6.99 41.53,6.99 41.53,-1.4 40.89,-1.4
  pour Top (isolate 0.813, rank 5): -13.08,88.9 -13.08,-4.95 62.48,-4.95 62.48,88.9
GPIO0
  Top 0.203: ESP:U1.9 17.78,37.38 17.78,39.71 28,49.93 32.33,49.93 32.97,49.28 32.97,46.35 33.74,45.58 U$1.16
GPIO1
  Top 0.203: U$1.18 34.64,48.12 32.47,50.28 27.85,50.28 16.45,38.88 ESP:U1.8
GPIO2
  Top 0.203: ESP:U1.7 15.24,37.38 15.24,38.17 27.72,50.66 U$1.20
GPIO3
  Top 0.203: U$1.22 32.61,51.01 27.57,51.01 14.89,38.33 14.63,38.33 13.91,37.62 ESP:U1.6
GPIO4
  Top 0.203: U$1.24 34.8,54.88 33.6,53.69 33.6,53.39 31.58,51.37 27.43,51.37 14.74,38.69 13.71,38.69 13.21,38.18 13.21,37.89 ESP:U1.5
GPIO5
  Top 0.203: U$1.23 36.05,57.02 34.4,57.02 33.48,56.11 33.48,54.16 33.25,53.93 33.25,53.54 31.44,51.72 27.28,51.72 14.6,39.04 12.8,39.04 11.94,38.18 11.94,37.89 ESP:U1.4
GPIO6
  Top 0.203: U$1.21 37.34,53.67 38.66,54.99 38.66,56.46 37.59,57.53 34.15,57.53 33.12,56.51 33.12,54.31 32.89,54.08 32.89,53.68 31.29,52.08 27.13,52.08 25.02,49.97 14.55,49.97 11.37,53.15 ESP:U1.25
GPIO7  (via drill 0.35)
  Top 0.203: ESP:U1.15 26.76,57.51 ESP:C1.2 | ESP:C1.2 29.4,57.66 v32.49,54.57 | ESP:S1.1 33.01,59.41 33.01,59.35 31.32,57.66 ESP:C1.2
  Top 0.254: ESP:S1.1 ESP:S1.2
  Bottom 0.203: U$1.19 36.14,51.85 32.86,51.85 32.49,52.22 v32.49,54.57
GPIO8  (via drill 0.35)
  Top 0.203: ESP:U1.16 22.8,54.29 23.39,53.7 25.16,53.7 26.33,54.86 30.73,54.86 v31.79,53.81
  Bottom 0.203: U$1.17 36.05,49.4 33.02,49.4 31.96,50.46 31.96,53.63 v31.79,53.81
GPIO9  (via drill 0.35)
  Top 0.203: ESP:U1.17 21.53,53.65 22.07,53.11 24.36,53.11 24.6,53.35 25.31,53.35 26.38,54.41 29.9,54.41 v31.28,53.03
  Bottom 0.203: v31.28,53.03 31.4,52.91 31.4,47.85 32.33,46.91 35.99,46.91 U$1.15
GPIO10  (via drill 0.35)
  Top 0.203: ESP:U1.18 20.26,53.4 20.9,52.76 24.51,52.76 24.75,52.99 25.46,52.99 26.52,54.05 29.05,54.05 v30.37,52.73
  Bottom 0.203: v30.37,52.73 30.49,52.61 30.49,46.6 32.72,44.37 35.99,44.37 U$1.13
GPIO11  (via drill 0.35)
  Top 0.203: ESP:U1.19 18.99,53.78 20.37,52.4 24.66,52.4 24.89,52.63 25.61,52.63 26.67,53.7 28.7,53.7 29.54,52.86 29.54,52.85 29.46,52.77 v29.46,52.73
  Bottom 0.203: v29.46,52.73 29.59,52.61 29.59,44.58 32.33,41.83 35.99,41.83 U$1.11
GPIO12  (via drill 0.35)
  Top 0.203: ESP:U1.20 17.72,53.77 19.45,52.05 24.81,52.05 25.04,52.28 25.75,52.28 26.82,53.34 28.12,53.34 28.55,52.91 v28.55,52.73
  Bottom 0.203: v28.55,52.73 28.68,52.61 28.68,40.92 30.3,39.29 35.99,39.29 U$1.9
GPIO13  (via drill 0.35)
  Top 0.203: ESP:U1.21 16.45,52.89 17.65,51.69 24.95,51.69 25.19,51.92 26.25,51.92 27.02,52.7 27.63,52.7 v27.64,52.71
  Bottom 0.203: v27.64,52.71 27.77,52.59 27.77,39.67 30.68,36.75 35.99,36.75 U$1.7
GPIO14  (via drill 0.35)
  Top 0.203: ESP:U1.23 13.91,52.89 15.47,51.33 25.41,51.33 v25.45,51.29
  Bottom 0.203: v25.45,51.29 25.45,40.21 31.45,34.21 35.99,34.21 U$1.5
GPIO15  (via drill 0.35)
  Top 0.203: ESP:U1.24 12.64,52.89 14.55,50.98 24.48,50.98 v24.81,50.65
  Bottom 0.203: U$1.3 36.49,30.34 35.29,31.53 31.97,31.53 26.42,37.08 24.81,38.69 v24.81,50.65
N$1  (via drill 0.35)
  Top 0.254: OUT:IC1.9 24.38,34.95 24.38,35.31
  Top 0.406: v28.32,29.59 28.3,29.59 OUT:D1.1 26.91,26.82 27.43,26.29 35.83,26.29 U$1.1 | 24.38,35.31 v25.15,36.07
  Bottom 0.406: v28.32,29.59 25.15,32.77 v25.15,36.07
N$5
  Top 0.254: 7.75,29.45 7.75,29.17 | 7.75,29.17 7.75,28.82 OUT:IC2.11 | ESP:U1.10 18.45,36.78 18.45,36.46 18.11,36.12 14.92,36.12 13.69,34.89 ESP:R1.2 11.74,34.06 11.74,32.91 9.17,30.33 8.47,30.33 7.92,29.78 7.92,29.35 7.75,29.17
N$6  (via drill 0.35)
  Top 0.254: OUT:IC2.14 3.94,29.93 4.03,30.03 5.09,30.03 5.65,30.59 6.04,30.59 6.2,30.75 6.2,31.94 6.83,32.57 9.16,32.57 9.55,32.95 9.55,34.14 11.32,35.92 v13.61,35.92 | v21.59,38.86 21.59,37.38 ESP:U1.12
  Bottom 0.254: v21.59,38.86 20.78,38.86 20.53,38.61 16.3,38.61 v13.61,35.92
N$7  (via drill 0.35)
  Top 0.254: ESP:U1.11 20.26,39.57 20.26,39.56 v20.26,39.27 | v8.8,31.15 8.72,31.15 8.31,30.74 8.03,30.46 7.6,30.46 6.6,29.46 6.48,29.34 OUT:IC2.12
  Bottom 0.254: v20.26,39.27 20.16,39.37 16.09,39.37 8.8,32.09 v8.8,31.15
OUT0
  Top 0.203: OUT:F1.2 32.89,30.5 32.89,28.57 33.67,27.8 U$1.2
OUT1
  Top 0.203: OUT:F2.2 32.89,33.33 32.89,31.62 34.18,30.34 U$1.4
OUT2
  Top 0.203: OUT:F3.2 32.77,36.3 32.77,34.42 34.31,32.88 U$1.6
OUT3
  Top 0.203: OUT:F4.2 33.15,38.75 33.15,36.7 34.43,35.42 U$1.8
OUT4
  Top 0.203: OUT:F5.2 31.64,42.84 32.77,41.71 32.77,40.01 32.77,39.99 U$1.10
OUT5
  Top 0.203: OUT:F6.2 31.64,45.42 32.47,44.59 32.47,42.82 U$1.12
OUT6
  Top 0.203: OUT:F7.2 31.64,47.78 32.51,46.91 32.51,45.32 U$1.14
OUT:N$1
  Top 0.203: OUT:IC1.16 15.37,30.86 16.13,30.1 27.04,30.1 OUT:F1.1
OUT:N$2
  Top 0.203: OUT:IC1.15 16.64,31.75 17.91,30.48 25.76,30.48 27.85,32.58 27.85,33.75 OUT:F2.1
OUT:N$3
  Top 0.203: OUT:IC1.14 17.91,32 19.05,30.86 25.63,30.86 27.5,32.72 27.5,36.64 28.28,37.42 OUT:F3.1
OUT:N$4
  Top 0.203: OUT:IC1.13 19.18,32.13 20.07,31.24 25.51,31.24 27.1,32.83 27.1,39.04 28.32,40.26 OUT:F4.1
OUT:N$5
  Top 0.203: OUT:IC1.12 20.45,32.26 20.95,31.75 25.52,31.75 26.75,32.98 26.75,41.73 28.11,43.09 OUT:F5.1
OUT:N$6
  Top 0.203: OUT:IC1.11 21.72,32.13 25.39,32.13 26.39,33.13 26.39,43.66 28.66,45.93 OUT:F6.1
OUT:N$7
  Top 0.203: OUT:IC1.10 22.99,32.64 25.4,32.64 26.04,33.27 26.04,36.96 26.04,46.12 OUT:F7.1
OUT:N$8
  Top 0.203: OUT:IC2.1 1.4,24.19 4.43,27.22 9.03,27.22 9.33,27.52 14.21,27.52 OUT:IC1.1
OUT:N$9
  Top 0.203: 16.57,27.75 16.76,27.94 | OUT:IC1.2 16.64,27.81 16.57,27.75 | 16.57,27.75 16.14,27.75 15.56,27.17 9.48,27.17 9.18,26.86 5.34,26.86 2.67,24.19 OUT:IC2.2
OUT:N$10
  Top 0.203: 17.65,27.56 17.91,27.81 | OUT:IC1.3 17.91,27.81 | 17.91,27.81 17.65,27.56 | OUT:IC2.3 3.94,24.19 6.25,26.51 9.32,26.51 9.63,26.81 16.91,26.81 17.65,27.56
OUT:N$11
  Top 0.203: OUT:IC1.4 19.18,28.24 17.39,26.46 9.78,26.46 9.47,26.15 7.17,26.15 5.21,24.19 OUT:IC2.4
OUT:N$12
  Top 0.203: OUT:IC1.5 20.45,28.24 18.31,26.1 9.92,26.1 9.62,25.8 8.08,25.8 6.48,24.19 OUT:IC2.5
OUT:N$13
  Top 0.203: OUT:IC1.6 21.72,28.24 19.22,25.75 10.07,25.75 9.77,25.44 9,25.44 7.75,24.19 OUT:IC2.6
OUT:N$14
  Top 0.203: OUT:IC1.7 22.99,27.56 20.82,25.39 10.22,25.39 9.02,24.19 OUT:IC2.7
OUT:N$31
  Top 0.152: 2.54,28.07 3.06,27.55 8.14,27.55 8.28,27.68 8.28,29.63 8.62,29.98 9.32,29.98 10.46,31.11 OUT:R1.1
  Top 0.254: OUT:IC2.15 2.67,28.19 2.54,28.07
OUT:N$35
  Top 0.254: OUT:R1.2 13.61,31.05 13.61,29.05 OUT:D2.A
PWR:12V_FUSED  (via drill 0.35)
  Top 0.254: PWR:U2.5 13.46,8.64 v13.49,8.67
  Bottom 0.254: v13.49,8.67 15.27,8.67 16.76,10.16 17.75,10.16 v18.16,10.57
  pour Top (rank 2, no thermals): 25.27,18.41 19.3,18.41 18.16,17.27 13.46,17.27 13.08,16.89 13.08,15.88 15.49,13.46 15.49,9.02 17.4,9.02 18.03,9.65 18.03,10.29 18.29,10.54 19.05,10.54 22.35,13.84 25.15,13.84 25.27,13.97 25.27,14.1 25.4,14.22 25.4,18.29
PWR:N$1  (via drill 0.35)
  Top 0.254: PWR:L1.1 19.75,8.89 20.83,8.89
  Top 0.406: PWR:C1.2 14.31,6.56 v14.61,6.86 | 20.83,8.89 21.21,8.89 v21.34,8.76
  Top 0.61: PWR:U2.2 19.47,8.64 PWR:L1.1
  Bottom 0.406: v14.61,6.86 16.51,8.76 v21.34,8.76
PWR:N$2
  Top 0.406: PWR:C1.1 13.87,6.97 13.87,7.16 14.3,7.59 14.4,7.59 PWR:U2.6
PWR:N$3
  Top 0.61: PWR:U2.4 14.47,9.61 PWR:R13.2 PWR:R12.1
PWR:N$4
  Top 0.508: PWR:C8.1 31.18,4.3 PWR:U3.6
PWR:N$5
  Top 0.254: PWR:R9.2 PWR:D6.A
PWR:N$6
  Top 0.406: PWR:D1.A 5.75,7.75 PWR:R1.2
PWR:N$7
  Top 0.406: PWR:D2.A 5.75,9.78 PWR:R2.2
PWR:N$11
  Top 0.508: PWR:R5.2 29.34,2.33 PWR:R4.1 29.36,2.3 29.36,4.01 29.28,4.09 PWR:U3.4
PWR:N$12
  Top 0.406: PWR:R6.2 9.44,17.87 PWR:U1.3 11.42,17.77 11.94,18.29 11.6,18.63 PWR:R7.1
PWR:N$13
  Top 0.406: PWR:R7.2 13.3,20.33 13.32,20.31 PWR:U1.8 14.99,20.31 PWR:R8.1
PWR:N$14
  Top 0.406: PWR:U1.7 16.84,19.04 PWR:R11.1
PWR:N$15
  Top 0.406: PWR:U1.2 7.29,19.04 PWR:C6.1
PWR:N$17
  Top 0.254: PWR:D6.C 12.43,16.75 12.57,16.89 13.45,17.77 PWR:U1.6 14.44,17.87 17.02,17.87 PWR:R10.2
PWR:N$35
  Top 0.406: PWR:D3.A PWR:R3.2
PWR:SW
  Top 0.508: PWR:C8.2 34.76,4.53 34.92,4.7
  pour Top (no thermals): 37.21,6.22 31.11,6.22 30.61,6.73 30.61,7.87 29.84,7.87 29.84,5.59 30.1,5.33 32.13,5.33 32.13,4.57 32.77,3.94 37.21,3.94
RX
  Top 0.254: ESP:U1.26 10.1,56.34 10.52,56.76 21.59,56.76 26.29,61.47 27,61.47 CAN:U1.2
TX
  Top 0.254: 26.42,62.87 21.21,57.66 10.45,57.66 9.37,56.58 9.37,55.37 ESP:U1.27
  Top 0.406: CAN:U1.3 26.42,62.87
USB:5V
  Top 0.254: USB:D1.C 28.76,13.97 26.67,13.97 25.91,14.73 25.91,17.15 26.77,18.01 28.1,18.01 28.84,18.75 28.84,19.48 28.38,19.94 USB:U1.5
USB:N$1
  Top 0.203: USB:J1.A5 29.83,18.31 28.62,17.11 USB:R1.2
USB:N$2
  Top 0.203: USB:J1.B5 31.81,21.31 USB:R2.1
USB:N$5
  Top 0.203: USB:D1.A 30.15,17.14 31.62,17.14 | 31.62,17.14 32,17.14 | USB:J1.A4_B9 32.59,17.14 31.62,17.14
  Top 0.254: USB:J1.B4_A9 33.03,21.96 33.91,21.08 34.04,20.95 34.04,18.16 33.04,17.16 USB:J1.A4_B9
USB:N$6
  Top 0.406: USB:C1.1 37.93,14.67 | 37.93,14.67 37.54,15.06 | 37.54,15.06 USB:J1.SH3 | USB:J1.SH2 USB:J1.SH4 USB:J1.SH3 | USB:J1.SH3 37.54,15.06 | USB:J1.SH1 USB:J1.SH3 | USB:J1.SH3 37.54,15.06 | USB:R3.2 USB:C1.1 | USB:C1.1 37.93,14.67 | 37.93,14.67 USB:J1.SH3
  pour Top (rank 2): 40.64,25.4 31.75,25.4 31.75,13.84 40.77,13.84 40.77,14.99
  pour Bottom (rank 2): 40.64,25.4 31.75,25.4 31.75,13.84 40.77,13.84
USB:U_N
  Top 0.203: USB:U1.1 30.52,18.81 USB:J1.B7 33.13,18.81 33.15,18.8 33.4,18.8 33.53,18.92 33.66,19.05 33.66,19.68 33.53,19.81 USB:J1.A7
USB:U_P
  Top 0.203: 32,20.31 31.23,20.31 30.65,20.89 USB:U1.3 | 32,20.31 USB:J1.B6 | USB:J1.A6 31.74,19.31 31.62,19.43 31.62,19.93 32,20.31
USB_N  (via drill 0.35)
  Top 0.203: USB:U1.6 26.73,18.99 v26.67,19.05 | ESP:U1.13 22.8,38.57 v22.97,38.73
  Bottom 0.203: v26.67,19.05 22.97,22.75 v22.97,38.73
USB_P  (via drill 0.35)
  Top 0.203: USB:U1.4 26.73,20.89 v26.67,20.83 | ESP:U1.14 24.07,38.54 v23.88,38.73
  Bottom 0.203: v26.67,20.83 23.88,23.62 v23.88,38.73
(copper drawn outside any net)
  shapes: Top area x2

## Text on the board
SilkscreenTop: reset | 5V | GND | boot
SilkscreenBottom: CAN_HIGH | CAN_GND | CAN_LOW | Designed by: Laszlo Goczan | 3V3 | GND | 12V | 5V | CAN_BASE_V1.0